# EAGLE board sensor (EAGLE 9.6.2)
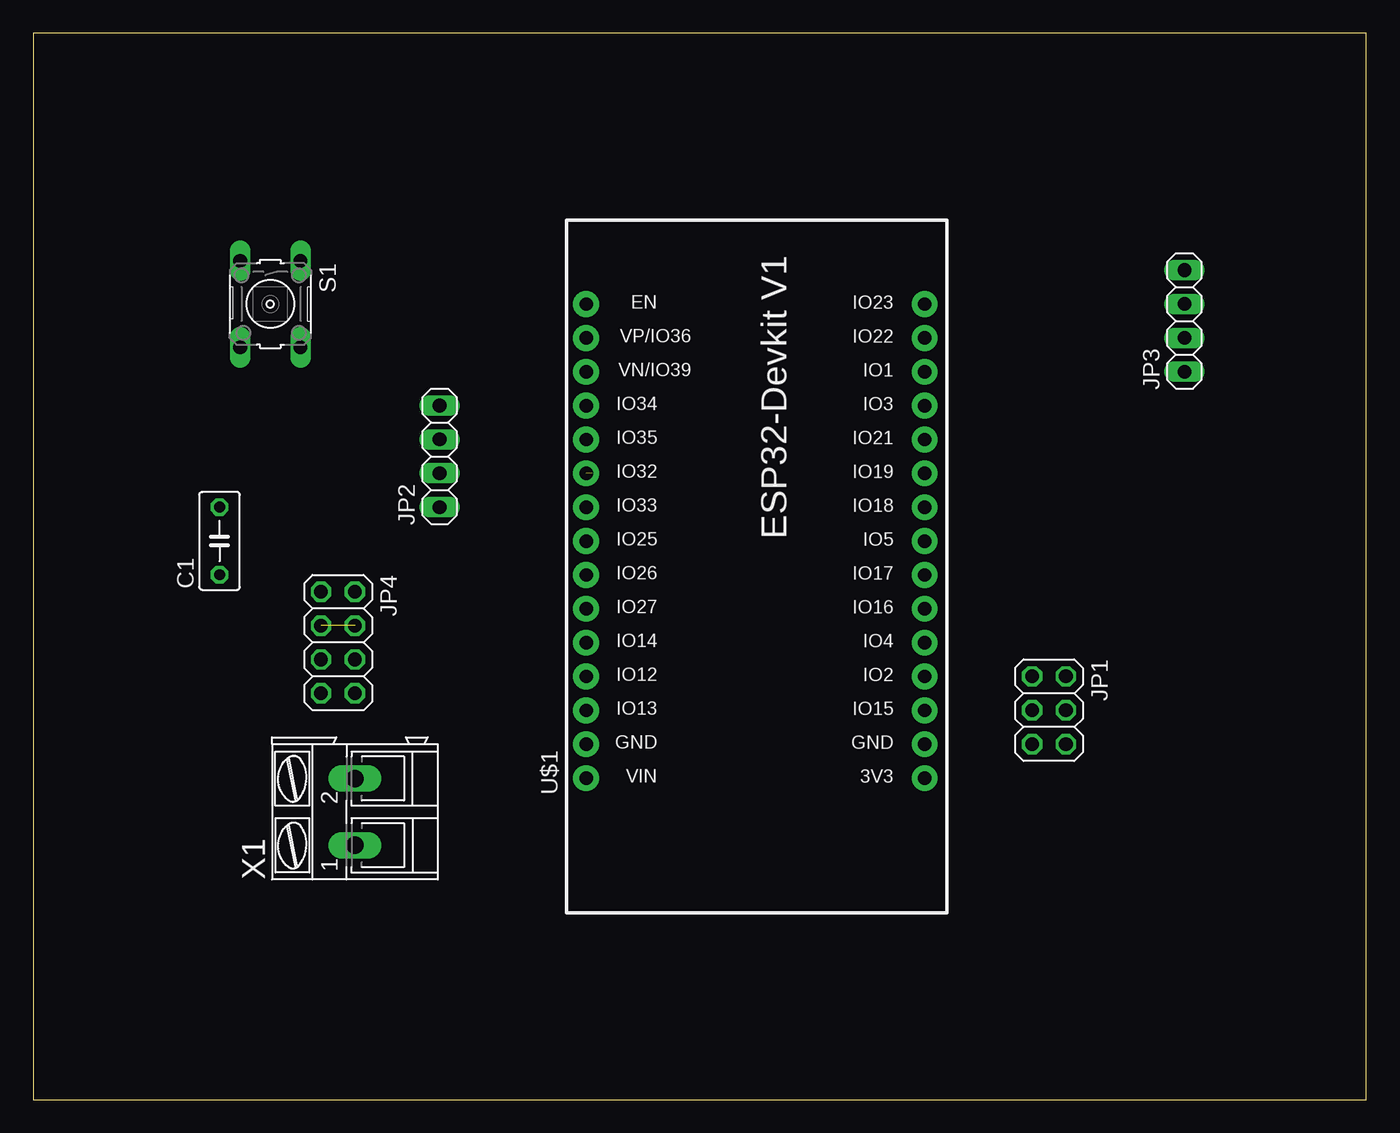
[diagram p0: board, top side]
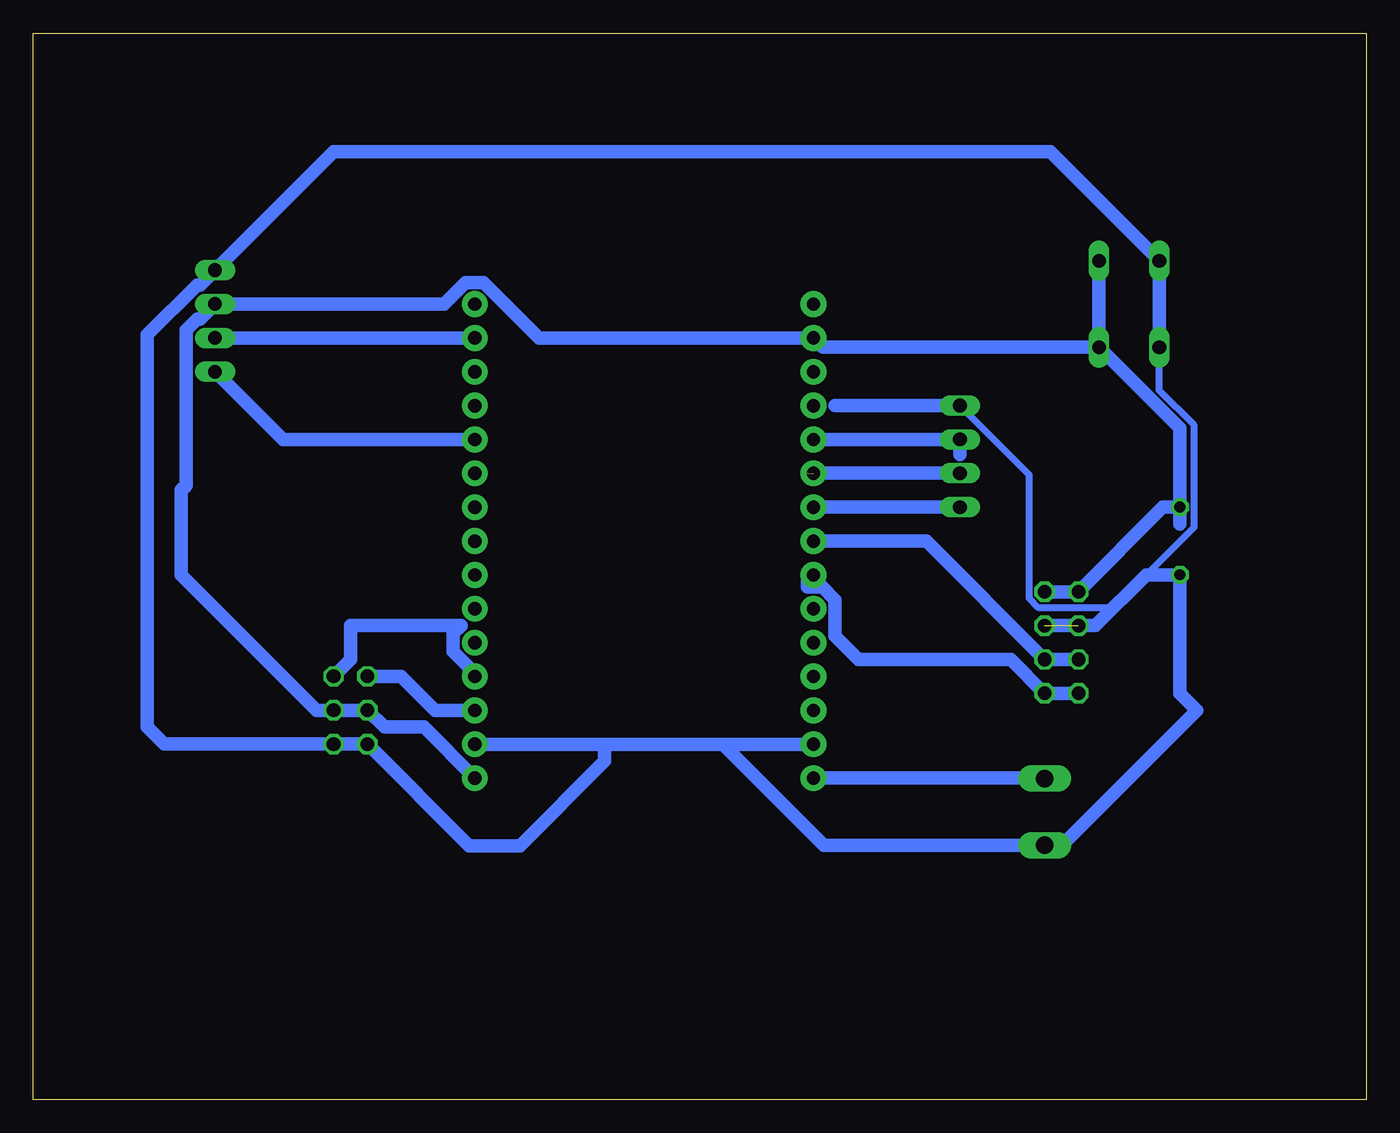
[diagram p1: board, bottom side, seen from below]

Size 100 x 80 mm. Coordinates in mm from the lower left corner, seen from the top.
Outline: 0,0 100,0 100,80 0,80 0,0
Copper layers (1*16): Top 0.035mm / dielectric 1.5mm / Bottom 0.035mm
Design rules "default": minimum track width 6mil, minimum drill 0.35mm, track to track 6mil, track to pad 6mil, pad to pad 6mil, via to via 6mil, smd to smd 6mil, copper to edge 40mil, drill to drill 6mil, minimum pad ring 10mil, minimum via ring 8mil, stop-mask expansion 4mil, vias tented up to drill 0mil, thermal gap 10mil

## Footprints (pad centres in the part's own frame; a part is rotated, then mirrored left to right if it is on the bottom)
C050-030X075 = drill 0.813 octagon: 1 -2.54,0; 2 2.54,0
2X03 = drill 1.016 octagon: 1 -2.54,-1.27; 2 -2.54,1.27; 3 0,-1.27; 4 0,1.27; 5 2.54,-1.27; 6 2.54,1.27
1X04 = drill 1.016 long: 1 -3.81,0; 2 -1.27,0; 3 1.27,0; 4 3.81,0
2X04 = drill 1.016 octagon: 1 -3.81,-1.27; 2 -3.81,1.27; 3 -1.27,-1.27; 4 -1.27,1.27; 5 1.27,-1.27; 6 1.27,1.27; 7 3.81,-1.27; 8 3.81,1.27
B3F-10XX = drill 1.016 long: 1 -3.251,2.261; 2 3.251,2.261; 3 -3.251,-2.261; 4 3.251,-2.261
ESP32-DEVKITV1 = drill 1 pad 1.93: 3V3 -16.52,-12.27; D1 13.96,-12.27; D2 -8.9,-12.27; D3 11.42,-12.27; D4 -6.36,-12.27; D5 1.26,-12.27; D12 -8.9,13.135; D13 -11.44,13.135; D14 -6.36,13.135; D15 -11.44,-12.27; D16 -3.82,-12.27; D17 -1.28,-12.27; D18 3.8,-12.27; D19 6.34,-12.27; D21 8.88,-12.27; D22 16.5,-12.27; D23 19.04,-12.27; D25 1.26,13.135; D26 -1.28,13.135; D27 -3.82,13.135; D32 6.34,13.135; D33 3.8,13.135; D34 11.42,13.135; D35 8.88,13.135; D36 16.5,13.135; D39 13.96,13.135; EN 19.04,13.135; GND@1 -13.98,13.135; GND@2 -13.98,-12.27; VIN -16.52,13.135
AK300/2 = drill 1.321 long: 1 -2.515,0; 2 2.489,0

## Placement (x,y rotation side)
C1  [C050-030X075]  13.97,41.91 90 top
JP1  [2X03]  76.2,29.21 270 top
JP2  [1X04]  30.48,48.26 90 top
JP3  [1X04]  86.36,58.42 90 top
JP4  [2X04]  22.86,34.29 270 top
S1  [B3F-10XX]  17.78,59.69 270 top
U$1  ESP32DEVKITV1  [ESP32-DEVKITV1]  54.61,40.64 90 top
X1  [AK300/2]  24.13,21.59 90 top

## Library data of the parts
C1 = rcl; SPICEPREFIX: C
JP1-JP4 = pinhead
S1 = switch-omron; MPN: B3F-1000; OC_FARNELL: 176432; OC_NEWARK: 36M3542
U$1 = esp32-devkitv1
X1 = con-ptr500; OC_FARNELL: unknown; OC_NEWARK: unknown

## Nets
GND: C1.1 JP1.5 JP1.6 JP2.4 JP3.4 JP4.3 JP4.4 S1.3 S1.4 U$1.GND@1 U$1.GND@2 X1.1
MOISTURE: JP1.2 U$1.D2
OUT1: JP2.1 U$1.D33
OUT2: JP2.2 U$1.D32
OUT3: JP2.3 U$1.D35
PH: JP1.1 U$1.D15
SCL: JP3.2 U$1.D22
SCL2: JP4.5 JP4.6 U$1.D25
SDA: JP3.1 U$1.D21
SDA2: JP4.7 JP4.8 U$1.D26
V: C1.2 JP1.3 JP1.4 JP3.3 JP4.1 JP4.2 S1.1 S1.2 U$1.3V3 U$1.D36
VIN: U$1.VIN X1.2

## Tracks (layer width: path | path; a pad name or v marks a point on that pad's centre or on a via)
GND  (1 unrouted)
  Bottom 0.508: S1.4 15.52,53.21 12.9,50.59 12.9,42.95 18.93,36.93 24.61,36.93 25.3,37.62 25.3,46.89 JP2.4
  Bottom 1.016: U$1.GND@1 48.26,26.66 | 48.26,26.66 57.15,26.66 | 57.15,26.66 U$1.GND@2 | U$1.GND@2 67.3,26.66 67.31,26.67 U$1.GND@2 | 57.15,26.66 57.15,25.4 63.5,19.05 67.31,19.05 JP1.5 JP1.6 90.17,26.67 91.44,27.94 91.44,57.38 87.71,61.11 87.48,61.11 JP3.4 77.47,71.12 23.7,71.12 S1.3 S1.4 | 48.26,26.66 40.67,19.07 X1.1 22.84,19.07 12.7,29.21 13.97,30.48 C1.1 16.51,39.37 20.32,35.56 JP4.4 | JP2.4 39.85,52.07
MOISTURE
  Bottom 1.016: JP1.2 76.2,33.02 76.2,35.56 67.92,35.56 67.91,35.55 68.51,34.95 68.51,33.61 67.31,32.41 67.31,31.75 67.3,31.74 U$1.D2
OUT1
  Bottom 1.016: JP2.1 41.47,44.45 U$1.D33
OUT2  (1 unrouted)
  Bottom 1.016: JP2.2 41.91,46.99
OUT3
  Bottom 1.016: U$1.D35 41.9,49.52 41.91,49.53 JP2.3 30.48,48.41
PH
  Bottom 1.016: JP1.1 72.39,31.75 69.84,29.2 U$1.D15
SCL
  Bottom 1.016: U$1.D22 JP3.2
SCL2
  Bottom 1.016: JP4.5 JP4.6 33.01,41.9 U$1.D25
SDA
  Bottom 1.016: JP3.1 81.27,49.52 U$1.D21
SDA2
  Bottom 1.016: JP4.7 JP4.8 26.67,33.02 38.1,33.02 39.85,34.77 39.85,37.49 40.8,38.45 41.91,38.45 41.91,38.92 U$1.D26
V
  Bottom 1.016: U$1.3V3 70.7,27.94 73.66,27.94 JP1.3 JP1.4 78.74,29.21 88.9,39.37 88.9,45.72 88.54,46.08 88.54,57.74 87.71,58.57 87.48,58.57 JP3.3 69.17,59.69 67.55,61.31 66.21,61.31 62.04,57.14 U$1.D36 40.77,56.44 S1.2 | S1.1 S1.2 | S1.2 13.97,50.37 C1.2 | C1.2 15.24,44.45 JP4.1 JP4.2 | C1.2 13.97,43.18
VIN
  Bottom 1.016: X1.2 24.17,24.12 U$1.VIN